# EAGLE board KombyPiMini (EAGLE 7.2.0)
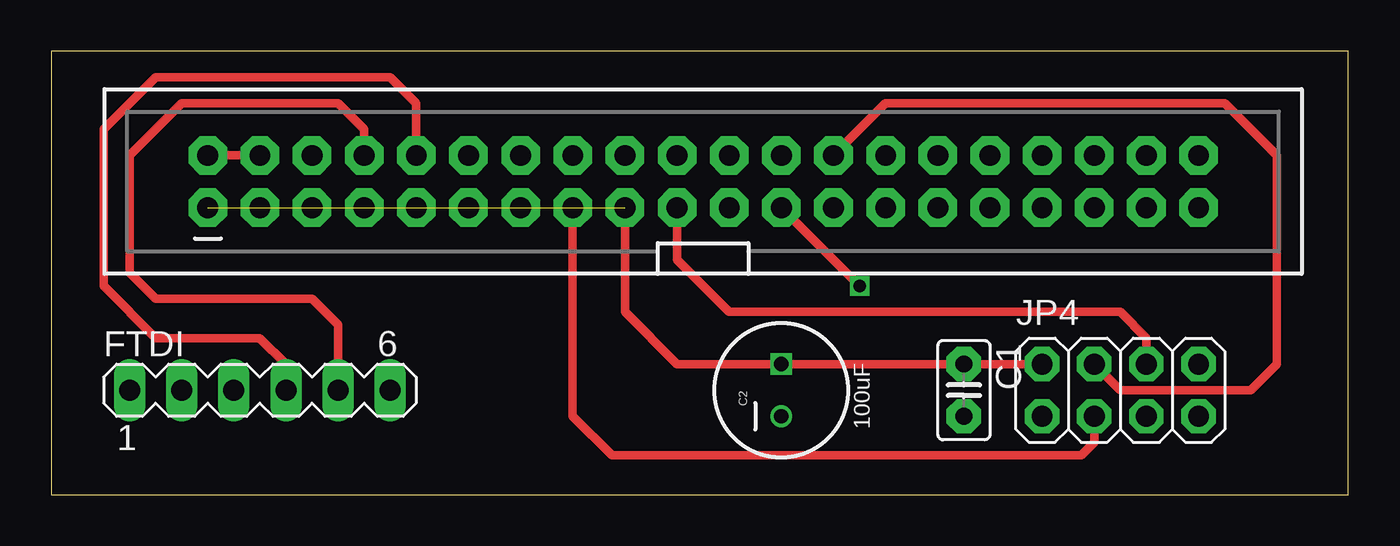
[diagram p0: board, top side]
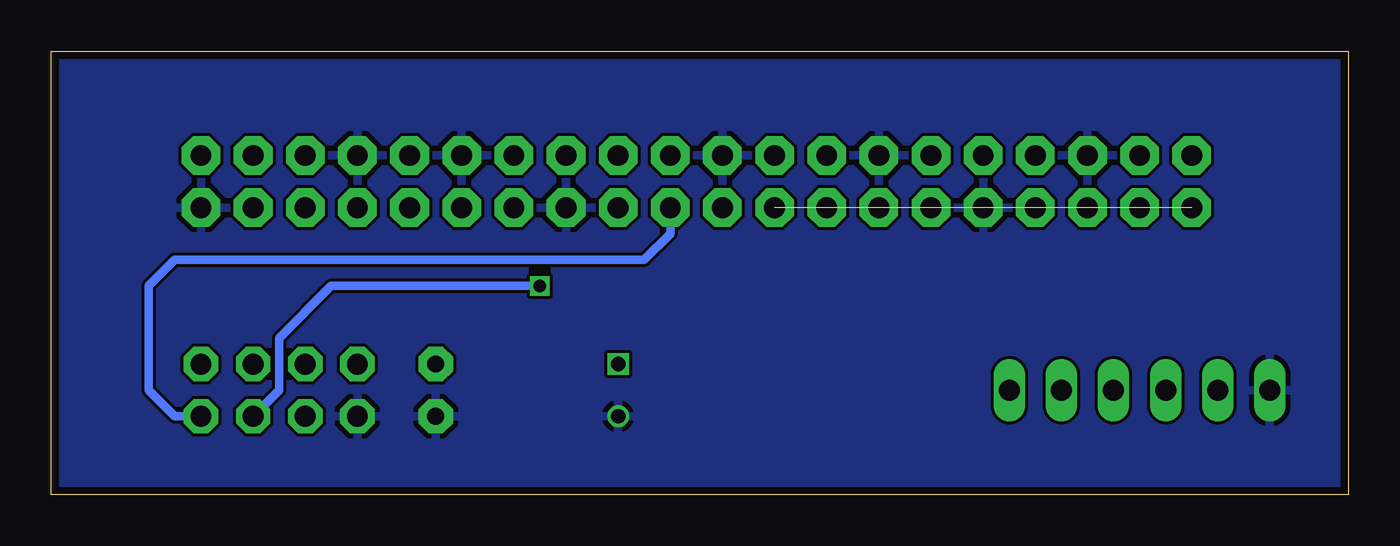
[diagram p1: board, bottom side, seen from below]

Size 63.17 x 21.58 mm. Coordinates in mm from the lower left corner, seen from the top.
Outline: 0,0 63.17,0 63.17,21.58 0,21.58 0,0
Copper layers (1*16): Top 0.0356mm / dielectric 1.5011mm / Bottom 0.0356mm
Design rules "oshpark": minimum track width 6mil, minimum drill 13mil, track to track 6mil, track to pad 6mil, pad to pad 6mil, via to via 6mil, smd to smd 6mil, copper to edge 15mil, drill to drill 6mil, minimum pad ring 7mil, minimum via ring 7mil, stop-mask expansion 4mil, vias tented up to drill 0mil, thermal gap 10mil
Net classes: 1 RFBoard: width 0.406 mm

## Footprints (pad centres in the part's own frame; a part is rotated, then mirrored left to right if it is on the bottom)
C025-025X050 = drill 0.813 pad 1.676 octagon: 1 -1.27,0; 2 1.27,0
CPOL-RADIAL-100UF-25V = drill 0.7 square: 1 1.27,0 | drill 0.7: 2 -1.27,0
MA06-1 = drill 1.016 long: 1 -6.35,0; 2 -3.81,0; 3 -1.27,0; 4 1.27,0; 5 3.81,0; 6 6.35,0
2X20-SHROUDED = drill 1.016 pad 1.88 octagon: 1 -1.27,24.13; 2 1.27,24.13; 3 -1.27,21.59; 4 1.27,21.59; 5 -1.27,19.05; 6 1.27,19.05; 7 -1.27,16.51; 8 1.27,16.51; 9 -1.27,13.97; 10 1.27,13.97; 11 -1.27,11.43; 12 1.27,11.43; 13 -1.27,8.89; 14 1.27,8.89; 15 -1.27,6.35; 16 1.27,6.35; 17 -1.27,3.81; 18 1.27,3.81; 19 -1.27,1.27; 20 1.27,1.27; 21 -1.27,-1.27; 22 1.27,-1.27; 23 -1.27,-3.81; 24 1.27,-3.81; 25 -1.27,-6.35; 26 1.27,-6.35; 27 -1.27,-8.89; 28 1.27,-8.89; 29 -1.27,-11.43; 30 1.27,-11.43; 31 -1.27,-13.97; 32 1.27,-13.97; 33 -1.27,-16.51; 34 1.27,-16.51; 35 -1.27,-19.05; 36 1.27,-19.05; 37 -1.27,-21.59; 38 1.27,-21.59; 39 -1.27,-24.13; 40 1.27,-24.13
2X04 = drill 1.016 pad 1.676 octagon: 1 -3.81,-1.27; 2 -3.81,1.27; 3 -1.27,-1.27; 4 -1.27,1.27; 5 1.27,-1.27; 6 1.27,1.27; 7 3.81,-1.27; 8 3.81,1.27

## Placement (x,y rotation side)
C1  0.1uF  [C025-025X050]  44.45,5.08 270 top
C2  100uF  [CPOL-RADIAL-100UF-25V]  35.56,5.08 90 top
FTDI  [MA06-1]  10.16,5.08 0 top
JP3  RASPBERRYPI-B+-GPIO  [2X20-SHROUDED]  31.75,15.24 90 top
JP4  [2X04]  52.07,5.08 0 top

## Library data of the parts
C1 JP4 = adafruit
C2 = SparkFun
FTDI = con-lstb; OC_FARNELL: unknown; OC_NEWARK: unknown
JP3 = SparkFun-Boards

## Nets
3.3V [RFBoard]: C1.1 C2.1 JP3.1 JP3.17 JP4.2
CE0: JP3.24
CE1 [RFBoard]: JP3.26 JP4.4
CTS: FTDI.2
FTDI_VCC: FTDI.3
GND: C1.2 C2.2 FTDI.1 JP3.6 JP3.9 JP3.14 JP3.20 JP3.25 JP3.30 JP3.34 JP3.39 JP4.1
MISO [RFBoard]: JP3.21 JP4.7
MOSI [RFBoard]: JP3.19 JP4.6
RF_CE [RFBoard]: JP3.15 JP4.3
RTS: FTDI.6
RXI: FTDI.4 JP3.10
SCL: JP3.5
SCLK: JP3.23 JP4.5
SDA: JP3.3
TXO: FTDI.5 JP3.8
VCC: JP3.2 JP3.4

## Tracks (layer width: path | path; a pad name or v marks a point on that pad's centre or on a via)
3.3V  (1 unrouted)
  Top 0.406: JP3.17 27.94,8.89 30.48,6.35 C2.1 C1.1 JP4.2
CE1
  Top 0.406: JP4.4 52.07,5.08 58.42,5.08 59.69,6.35 59.69,16.51 57.15,19.05 40.64,19.05 JP3.26
GND
  pour Bottom: 0,21.59 0,0 63.5,0 63.5,21.59
MISO
  Bottom 0.406: JP4.7 57.15,3.81 58.42,5.08 58.42,10.16 57.15,11.43 34.29,11.43 33.02,12.7 JP3.21
MOSI
  Top 0.406: JP3.19 30.48,11.43 33.02,8.89 52.07,8.89 53.34,7.62 JP4.6
RF_CE
  Top 0.406: JP3.15 25.4,3.81 27.3,1.91 50.16,1.91 50.8,2.54 JP4.3
RXI
  Top 0.406: JP3.10 17.78,19.05 16.51,20.32 5.08,20.32 2.54,17.78 2.54,10.16 5.08,7.62 10.16,7.62 11.43,6.35 FTDI.4
SCLK  (via drill 0.6)
  Top 0.406: v39.37,10.16 JP3.23
  Bottom 0.406: JP4.5 52.07,5.08 52.07,7.62 49.53,10.16 v39.37,10.16
TXO
  Top 0.406: JP3.8 15.24,17.78 13.97,19.05 6.35,19.05 3.81,16.51 3.81,10.79 5.08,9.53 12.7,9.53 13.97,8.26 FTDI.5
VCC
  Top 0.406: JP3.2 JP3.4